# Altium PCB LPCB280R0.PcbDoc (part 2 of 2)
Units mm, origin at the board's own origin, x right, y up, seen from the top; angles counter-clockwise.
Board outline 96 x 109 mm, 2 copper layers (Top Layer, Bottom Layer); 89 components, 73 nets, 288 pads, 730 vias.
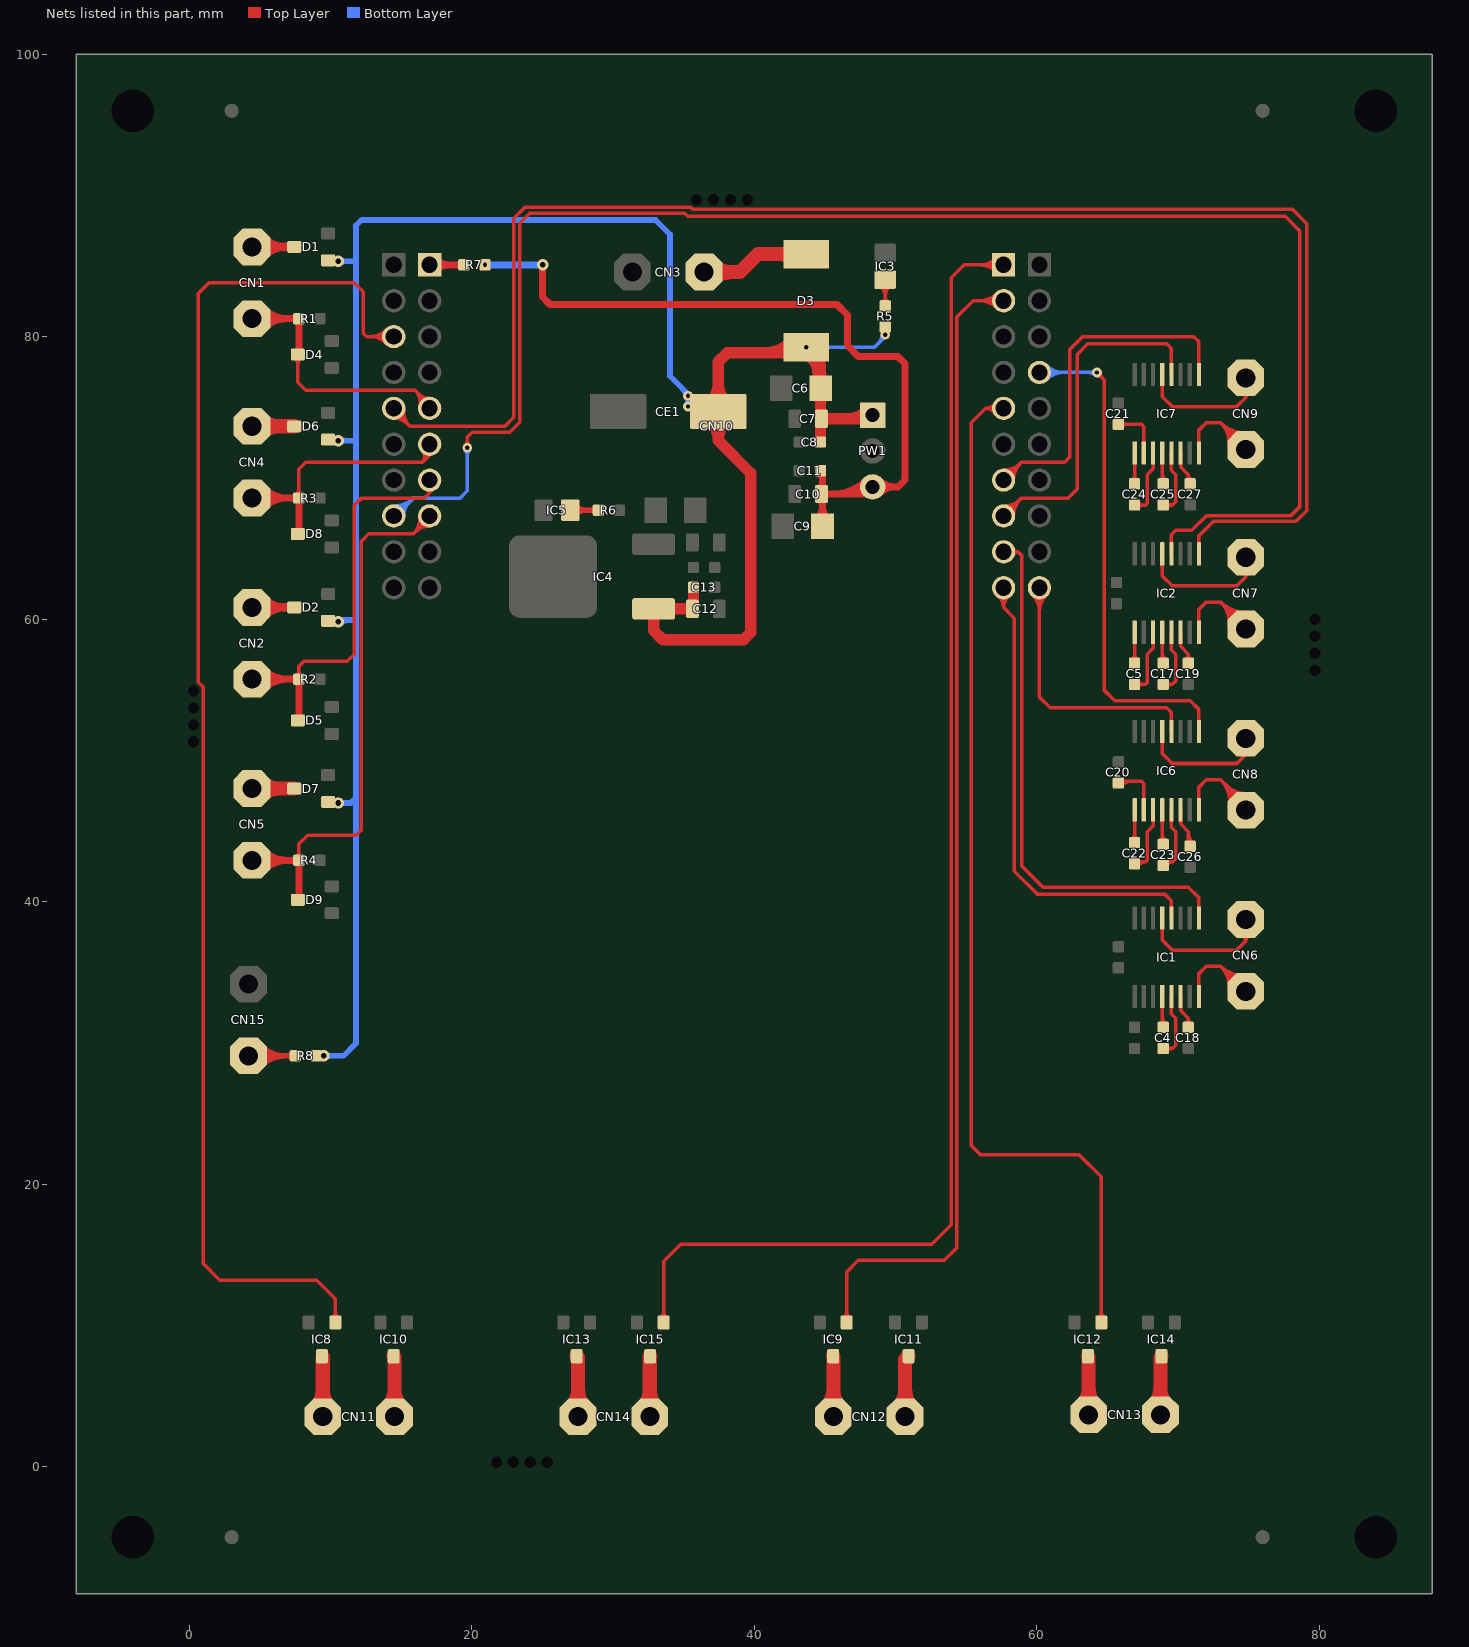
[diagram p2: the nets of this part, all layers, seen from the top]

## Via types
v1: diameter 0.9, hole 0.4, Top Layer to Bottom Layer, tented both sides, 659 vias
v2: diameter 0.7, hole 0.3, Top Layer to Bottom Layer, tented both sides, 36 vias
v3: diameter 0.8, hole 0.4, Top Layer to Bottom Layer, tented both sides, 22 vias
v4: diameter 0.6, hole 0.2, Top Layer to Bottom Layer, tented both sides, 13 vias

## Nets (pads, with @x,y where several pads share a name; then routed paths per layer and width w, separated by ;. In a path a pad name is that pad's centre, name@x,y a point inside that pad or via, vN(x,y) a via of type N, cw(c..) or ccw(c..) an arc to the next point about the centre after c; other vN are vias at no path point) (continued)
NetC4_1: C4.1 IC1.4 | length 3.3
  Top Layer w0.25: C4.1@68.767,31.297 ccw(c68.468,31.596) 68.89,31.596 ; 68.89,31.938 ccw(c69.796,31.938) C4.1@69.155,31.297 ; IC1.4@68.89,33.293 68.89,31.174 C4.1@68.961,31.103
NetC4_2: C4.2 IC1.5 | length 5.6
  Top Layer w0.25: C4.2@68.961,29.603 69.608,29.603 ; C4.2@69.159,29.412 cw(c69.608,28.979) 69.608,29.603 ; C4.2@69.159,29.794 ccw(c69.608,30.227) 69.608,29.603 ; IC1.5@69.54,33.293 69.54,32.06 69.85,31.75 69.85,29.845 69.608,29.603
NetC5_1: C5.1 IC2.1 | length 3.2
  Top Layer w0.25: C5.1@66.735,57.078 ccw(c66.239,57.574) 66.94,57.574 ; C5.1@66.94,56.895 IC2.1@66.94,59.074 ; 66.94,57.521 ccw(c67.566,57.521) C5.1@67.123,57.078
NetC5_2: C5.2 IC2.3 | length 5.7
  Top Layer w0.25: C5.2@66.929,55.384 67.703,55.384 67.818,55.499 67.818,57.531 68.24,57.953 IC2.3@68.24,59.074 ; C5.2@67.123,55.19 cw(c67.593,54.72) 67.593,55.384 cw(c67.593,56.048) C5.2@67.123,55.578
NetC17_1: C17.1 IC2.4 | length 3.3
  Top Layer w0.25: C17.1@68.767,57.078 ccw(c68.468,57.377) 68.89,57.377 ; 68.89,57.719 ccw(c69.796,57.719) C17.1@69.155,57.078 ; IC2.4@68.89,59.074 68.89,56.955 C17.1@68.961,56.884
NetC17_2: C17.2 IC2.5 | length 5.6
  Top Layer w0.25: C17.2@68.961,55.384 69.608,55.384 ; C17.2@69.159,55.193 cw(c69.608,54.76) 69.608,55.384 ; C17.2@69.159,55.575 ccw(c69.608,56.008) 69.608,55.384 ; IC2.5@69.54,59.074 69.54,57.841 69.85,57.531 69.85,55.626 69.608,55.384
NetC18_1: C18.1 IC1.6 | length 3.4
  Top Layer w0.25: IC1.6@70.19,33.293 70.19,32.299 70.739,31.75 ; C18.1@70.548,31.301 ccw(c70.115,31.75) 70.739,31.75 ; C18.1@70.739,31.103 70.739,31.75 ; C18.1@70.93,31.301 cw(c71.363,31.75) 70.739,31.75
NetC19_1: C19.1 IC2.6 | length 3.4
  Top Layer w0.25: IC2.6@70.19,59.074 70.19,58.08 70.739,57.531 ; C19.1@70.548,57.082 ccw(c70.115,57.531) 70.739,57.531 ; C19.1@70.739,56.884 70.739,57.531 ; C19.1@70.93,57.082 cw(c71.363,57.531) 70.739,57.531
NetC20_2: C20.2 IC6.2 | length 4.6
  Top Layer w0.25: C20.2@65.786,48.526 67.425,48.526 67.59,48.361 IC6.2@67.59,46.501 ; C20.2@65.98,48.205 cw(c66.757,47.428) 66.757,48.526
NetC21_2: C21.2 IC7.2 | length 4.8
  Top Layer w0.25: C21.2@65.786,73.799 67.425,73.799 67.59,73.634 IC7.2@67.59,71.774 ; C21.2@65.98,73.605 cw(c66.45,73.135) 66.45,73.799 cw(c66.45,74.463) C21.2@65.98,73.993
NetC22_1: C22.1 IC6.1 | length 3.2
  Top Layer w0.25: C22.1@66.735,44.378 ccw(c66.239,44.874) 66.94,44.874 ; C22.1@66.94,44.322 IC6.1@66.94,46.501 ; 66.94,44.821 ccw(c67.566,44.821) C22.1@67.123,44.378
NetC22_2: C22.2 IC6.3 | length 5.3
  Top Layer w0.25: C22.2@66.929,42.811 67.703,42.811 ; C22.2@67.154,42.526 cw(c67.703,42.14) 67.703,42.811 ; IC6.3@68.24,46.501 68.24,45.38 67.818,44.958 67.818,42.926 67.703,42.811
NetC23_1: C23.1 IC6.4 | length 3.3
  Top Layer w0.25: C23.1@68.767,44.251 ccw(c68.468,44.55) 68.89,44.55 ; 68.89,44.892 ccw(c69.796,44.892) C23.1@69.155,44.251 ; IC6.4@68.89,46.501 68.89,44.382 C23.1@68.961,44.311
NetC23_2: C23.2 IC6.5 | length 5.5
  Top Layer w0.25: C23.2@68.961,42.811 69.608,42.811 ; C23.2@68.986,42.552 cw(c69.302,42.488) C23.2@69.302,42.811 ; C23.2@69.231,42.502 cw(c69.608,42.426) 69.608,42.811 ; IC6.5@69.54,46.501 69.54,45.268 69.85,44.958 69.85,43.053 69.608,42.811
NetC24_1: C24.1 IC7.1 | length 3.2
  Top Layer w0.25: C24.1@66.735,69.778 ccw(c66.239,70.274) 66.94,70.274 ; C24.1@66.94,69.595 IC7.1@66.94,71.774 ; 66.94,70.221 ccw(c67.566,70.221) C24.1@67.123,69.778
NetC24_2: C24.2 IC7.3 | length 5.7
  Top Layer w0.25: C24.2@66.929,68.084 67.703,68.084 67.818,68.199 67.818,70.231 68.24,70.653 IC7.3@68.24,71.774 ; C24.2@67.123,67.89 cw(c67.593,67.42) 67.593,68.084 cw(c67.593,68.748) C24.2@67.123,68.278
NetC25_1: C25.1 IC7.4 | length 3.3
  Top Layer w0.25: C25.1@68.767,69.778 ccw(c68.468,70.077) 68.89,70.077 ; 68.89,70.419 ccw(c69.796,70.419) C25.1@69.155,69.778 ; IC7.4@68.89,71.774 68.89,69.655 C25.1@68.961,69.584
NetC25_2: C25.2 IC7.5 | length 5.6
  Top Layer w0.25: C25.2@68.961,68.084 69.608,68.084 ; C25.2@69.159,67.893 cw(c69.608,67.46) 69.608,68.084 ; C25.2@69.159,68.275 ccw(c69.608,68.708) 69.608,68.084 ; IC7.5@69.54,71.774 69.54,70.541 69.85,70.231 69.85,68.326 69.608,68.084
NetC26_1: C26.1 IC6.6 | length 3.3
  Top Layer w0.25: IC6.6@70.19,46.501 70.19,45.507 70.739,44.958 C26.1@70.739,44.311 ; 70.739,44.901 ccw(c71.837,44.901) C26.1@71.06,44.124
NetC27_1: C27.1 IC7.6 | length 2.9
  Top Layer w0.25: IC7.6@70.19,71.774 70.19,70.78 70.739,70.231 ; C27.1@70.739,69.584 70.739,70.231 ; C27.1@70.988,69.831 cw(c71.186,70.231) 70.739,70.231
NetCN1_1: CN1.1 D1.3 | length 10.3
  Top Layer w0.5: CN1.1@4.445,86.36 D1.3@7.436,86.36 ; CN1.1@4.834,85.971 cw(c5.773,85.032) 5.773,86.36 cw(c5.773,87.688) CN1.1@4.834,86.749 ; CN1.1@5.187,85.618 cw(c6.98,83.825) 6.98,86.36 cw(c6.98,88.895) CN1.1@5.187,87.102 ; 6.697,86.284 cw(c6.894,85.551) D1.3@7.273,86.208 ; 6.697,86.436 ccw(c6.894,87.169) D1.3@7.273,86.512
NetCN1_2: CN1.2 CN10.J3_5 D4.3 R1.2 | length 28.6
  Top Layer w0.25: D4.3@7.478,78.528 cw(c6.966,78.016) 7.69,78.016 cw(c8.414,78.016) D4.3@7.902,78.528 ; D4.3@7.69,78.74 7.69,76.765 8.255,76.2 16.002,76.2 ; 16.257,75.945 ccw(c17.018,76.707) CN10.J3_5@17.018,75.63 ; 16.327,75.875 cw(c15.671,75.219) CN10.J3_5@16.578,75.024 ; CN10.J3_5@16.334,75.077 ccw(c15.136,75.334) 16.002,76.2 ; CN10.J3_5@17.018,74.93 17.018,75.184 16.002,76.2
  Top Layer w0.5: CN1.2@4.445,81.28 R1.2@7.759,81.28 7.759,78.809 D4.3@7.69,78.74 ; CN1.2@4.834,80.891 cw(c5.773,79.952) 5.773,81.28 cw(c5.773,82.608) CN1.2@4.834,81.669 ; CN1.2@5.187,80.538 cw(c6.98,78.745) 6.98,81.28 cw(c6.98,83.815) CN1.2@5.187,82.022 ; 7.759,79.177 ccw(c8.202,79.177) D4.3@7.889,78.864
NetCN2_1: CN2.1 D2.3 | length 10.3
  Top Layer w0.5: CN2.1@4.445,60.833 D2.3@7.436,60.833 ; CN2.1@4.834,60.444 cw(c5.773,59.505) 5.773,60.833 cw(c5.773,62.161) CN2.1@4.834,61.222 ; CN2.1@5.187,60.091 cw(c6.98,58.298) 6.98,60.833 cw(c6.98,63.368) CN2.1@5.187,61.575 ; 6.697,60.757 cw(c6.894,60.024) D2.3@7.273,60.681 ; 6.697,60.909 ccw(c6.894,61.642) D2.3@7.273,60.985
NetCN2_2: CN2.2 CN10.J3_7 D5.3 R2.2 | length 36.6
  Top Layer w0.25: R2.2@7.565,55.947 ccw(c7.095,56.417) 7.759,56.417 ccw(c8.423,56.417) R2.2@7.953,55.947 ; R2.2@7.759,55.753 7.759,56.654 8.128,57.023 11.176,57.023 11.684,57.531 11.684,68.072 12.192,68.58 16.637,68.58 17.018,68.961 ; CN10.J3_7@16.854,69.17 cw(c16.804,68.961) 17.018,68.961 ; CN10.J3_7@17.018,69.85 17.018,68.961 ; CN10.J3_7@17.182,69.17 ccw(c17.232,68.961) 17.018,68.961
  Top Layer w0.5: CN2.2@4.445,55.753 R2.2@7.759,55.753 7.759,52.901 D5.3@7.69,52.832 ; CN2.2@4.834,55.364 cw(c5.773,54.425) 5.773,55.753 cw(c5.773,57.081) CN2.2@4.834,56.142 ; CN2.2@5.187,55.011 cw(c6.98,53.218) 6.98,55.753 cw(c6.98,58.288) CN2.2@5.187,56.495 ; 7.759,53.269 ccw(c8.202,53.269) D5.3@7.889,52.956
NetCN3_1: CN3.1 D3.2 | length 12.8
  Top Layer w1: CN3.1@36.449,84.582 38.989,84.582 40.257,85.85 D3.2@43.688,85.85 ; CN3.1@37.015,84.016 cw(c38.38,82.651) 38.38,84.582 cw(c38.38,86.513) CN3.1@37.015,85.148 ; D3.2@42.739,85.485 ccw(c41.858,84.604) 41.858,85.85 ccw(c41.858,87.096) D3.2@42.739,86.215
NetCN4_1: CN4.1 D6.3 | length 6
  Top Layer w1: CN4.1@4.445,73.66 D6.3@7.436,73.66 ; CN4.1@5.011,73.094 cw(c6.376,71.729) 6.376,73.66 cw(c6.376,75.591) CN4.1@5.011,74.226
NetCN4_2: CN4.2 CN10.J3_6 D8.3 R3.2 | length 28.4
  Top Layer w0.25: R3.2@7.565,68.774 ccw(c7.095,69.244) 7.759,69.244 ccw(c8.423,69.244) R3.2@7.953,68.774 ; R3.2@7.759,68.58 7.759,70.624 8.255,71.12 16.51,71.12 ; CN10.J3_6@16.516,71.902 cw(c16.116,71.514) 16.51,71.12 ; 16.689,71.299 ccw(c16.298,71.691) CN10.J3_6@16.695,72.077 ; 16.869,71.479 ccw(c16.48,71.868) CN10.J3_6@16.875,72.251 ; CN10.J3_6@17.018,72.39 17.018,71.628 16.51,71.12
  Top Layer w0.5: CN4.2@4.445,68.58 R3.2@7.759,68.58 7.759,66.109 D8.3@7.69,66.04 ; CN4.2@4.834,68.191 cw(c5.773,67.252) 5.773,68.58 cw(c5.773,69.908) CN4.2@4.834,68.969 ; CN4.2@5.187,67.838 cw(c6.98,66.045) 6.98,68.58 cw(c6.98,71.115) CN4.2@5.187,69.322 ; 7.759,66.477 ccw(c8.202,66.477) D8.3@7.889,66.164
NetCN5_1: CN5.1 D7.3 | length 6
  Top Layer w1: CN5.1@4.445,48.006 D7.3@7.436,48.006 ; CN5.1@5.011,47.44 cw(c6.376,46.075) 6.376,48.006 cw(c6.376,49.937) CN5.1@5.011,48.572
NetCN5_2: CN5.2 CN10.J3_8 D9.3 R4.2 | length 49.7
  Top Layer w0.25: R4.2@7.565,43.12 ccw(c7.095,43.59) 7.759,43.59 ccw(c8.423,43.59) R4.2@7.953,43.12 ; R4.2@7.759,42.926 7.759,44.081 8.382,44.704 11.811,44.704 12.192,45.085 12.192,65.532 12.7,66.04 15.875,66.04 ; 16.04,66.205 cw(c17.018,65.227) CN10.J3_8@17.018,66.61 ; 16.257,66.422 ccw(c15.494,67.185) CN10.J3_8@16.569,67.273 ; CN10.J3_8@16.32,67.253 cw(c14.788,67.127) 15.875,66.04 ; 16.467,66.632 cw(c17.018,66.08) CN10.J3_8@17.018,66.86 ; CN10.J3_8@17.018,67.31 17.018,67.183 15.875,66.04
  Top Layer w0.5: CN5.2@4.445,42.926 R4.2@7.759,42.926 7.759,40.201 D9.3@7.69,40.132 ; CN5.2@4.834,42.537 cw(c5.773,41.598) 5.773,42.926 cw(c5.773,44.254) CN5.2@4.834,43.315 ; CN5.2@5.187,42.184 cw(c6.98,40.391) 6.98,42.926 cw(c6.98,45.461) CN5.2@5.187,43.668 ; 7.759,40.569 ccw(c8.202,40.569) D9.3@7.889,40.256
NetCN6_1: CN6.1 IC1.8 | length 14.6
  Top Layer w0.25: IC1.8@71.49,33.293 71.49,34.914 72.009,35.433 73.025,35.433 CN6.1@74.803,33.655 ; CN6.1@73.633,33.759 ccw(c71.538,33.946) 73.025,35.433 ccw(c74.512,36.92) CN6.1@74.699,34.825 ; CN6.1@73.882,33.737 ccw(c72.233,33.884) 73.403,35.055 ccw(c74.574,36.225) CN6.1@74.721,34.576 ; CN6.1@74.131,33.715 ccw(c72.927,33.822) 73.782,34.676 ccw(c74.636,35.531) CN6.1@74.743,34.327
NetCN6_2: CN6.2 IC1.13 | length 10.6
  Top Layer w0.25: IC1.13@68.89,38.843 68.89,37.282 69.596,36.576 74.168,36.576 74.803,37.211 ; CN6.2@74.504,37.599 cw(c74.402,37.211) 74.803,37.211 ; CN6.2@74.803,38.735 74.803,37.211 ; CN6.2@75.102,37.599 ccw(c75.204,37.211) 74.803,37.211
NetCN7_1: CN7.1 IC2.8 | length 15.1
  Top Layer w0.25: IC2.8@71.49,59.074 71.49,60.695 72.009,61.214 73.025,61.214 CN7.1@74.803,59.436 ; 73.389,60.85 cw(c72.163,59.624) CN7.1@73.885,59.419 ; 73.449,60.79 ccw(c74.791,62.131) CN7.1@74.799,60.234 ; CN7.1@73.636,59.448 ccw(c71.513,59.702) 73.025,61.214 ccw(c74.787,62.976) CN7.1@74.798,60.484 ; 73.753,60.486 cw(c72.814,59.547) CN7.1@74.133,59.389 ; 73.874,60.365 ccw(c74.795,61.287) CN7.1@74.8,59.984
NetCN7_2: CN7.2 IC2.13 | length 10.2
  Top Layer w0.25: IC2.13@68.89,64.624 68.89,63.063 69.596,62.357 74.168,62.357 74.803,62.992 ; CN7.2@74.602,63.231 cw(c74.56,62.992) 74.803,62.992 ; CN7.2@74.803,64.516 74.803,62.992 ; CN7.2@75.004,63.231 ccw(c75.046,62.992) 74.803,62.992
NetCN8_1: CN8.1 IC6.8 | length 15
  Top Layer w0.25: IC6.8@71.49,46.501 71.49,48.122 72.009,48.641 73.025,48.641 CN8.1@74.803,46.863 ; 73.025,48.641 cw(c71.448,47.064) CN8.1@73.645,46.683 ; 73.366,48.3 cw(c72.029,46.963) CN8.1@73.892,46.64 ; 73.448,48.218 ccw(c74.803,49.574) CN8.1@74.803,47.657 ; 73.706,47.96 cw(c72.61,46.863) CN8.1@74.138,46.597 ; 73.874,47.792 ccw(c74.803,48.72) CN8.1@74.803,47.407 ; CN8.1@74.047,47.619 cw(c73.19,46.762) CN8.1@74.384,46.555
NetCN8_2: CN8.2 IC6.13 | length 9.6
  Top Layer w0.25: IC6.13@68.89,52.051 68.89,50.49 69.596,49.784 74.168,49.784 74.803,50.419 CN8.2@74.803,51.943
NetCN9_1: CN9.1 IC7.8 | length 15.1
  Top Layer w0.25: IC7.8@71.49,71.774 71.49,73.395 72.009,73.914 73.025,73.914 CN9.1@74.803,72.136 ; 73.389,73.55 cw(c72.163,72.324) CN9.1@73.885,72.119 ; 73.449,73.49 ccw(c74.791,74.831) CN9.1@74.799,72.934 ; CN9.1@73.636,72.148 ccw(c71.513,72.402) 73.025,73.914 ccw(c74.787,75.676) CN9.1@74.798,73.184 ; 73.753,73.186 cw(c72.814,72.247) CN9.1@74.133,72.089 ; 73.874,73.065 ccw(c74.795,73.987) CN9.1@74.8,72.684
NetCN9_2: CN9.2 IC7.13 | length 10.2
  Top Layer w0.25: IC7.13@68.89,77.324 68.89,75.763 69.596,75.057 74.168,75.057 74.803,75.692 ; CN9.2@74.602,75.931 cw(c74.56,75.692) 74.803,75.692 ; CN9.2@74.803,77.216 74.803,75.692 ; CN9.2@75.004,75.931 ccw(c75.046,75.692) 74.803,75.692
NetCN10_J3_1: CN10.J3_1 R7.1 | length 4.6
  Top Layer w0.5: CN10.J3_1@17.018,85.09 R7.1@19.443,85.09 ; CN10.J3_1@17.425,84.683 cw(c18.406,83.702) 18.406,85.09 cw(c18.406,86.478) CN10.J3_1@17.425,85.497
NetCN11_1: CN11.1 IC8.3 | length 7.3
  Top Layer w1: CN11.1@8.885,4.103 ccw(c7.52,5.468) 9.451,5.468 ccw(c11.382,5.468) CN11.1@10.017,4.103 ; CN11.1@9.451,3.537 IC8.3@9.451,7.764
NetCN11_2: CN11.2 IC10.3 | length 7.3
  Top Layer w1: CN11.2@13.965,4.103 ccw(c12.6,5.468) 14.531,5.468 ccw(c16.462,5.468) CN11.2@15.097,4.103 ; IC10.3@14.478,7.817 14.531,7.764 CN11.2@14.531,3.537
NetCN12_1: CN12.1 IC9.3 | length 7.3
  Top Layer w1: CN12.1@45.038,4.103 ccw(c43.672,5.468) 45.604,5.468 ccw(c47.535,5.468) CN12.1@46.169,4.103 ; IC9.3@45.593,7.817 45.604,7.806 CN12.1@45.604,3.537
NetCN12_2: CN12.2 IC11.3 | length 7.9
  Top Layer w1: CN12.2@50.118,4.103 ccw(c48.752,5.468) 50.684,5.468 ccw(c52.615,5.468) CN12.2@51.249,4.103 ; CN12.2@50.684,3.537 50.684,7.574 IC11.3@50.927,7.817 ; IC11.3@50.684,7.336 cw(c51.333,7.336) IC11.3@50.874,7.795
NetCN13_1: CN13.1 IC12.3 | length 7.2
  Top Layer w1: CN13.1@63.114,4.23 ccw(c61.749,5.595) 63.68,5.595 ccw(c65.611,5.595) CN13.1@64.246,4.23 ; IC12.3@63.627,7.817 63.68,7.764 CN13.1@63.68,3.664
NetCN13_2: CN13.2 IC14.3 | length 7.2
  Top Layer w1: CN13.2@68.194,4.23 ccw(c66.829,5.595) 68.76,5.595 ccw(c70.691,5.595) CN13.2@69.326,4.23 ; CN13.2@68.76,3.664 68.76,7.743 IC14.3@68.834,7.817
NetCN14_1: CN14.1 IC13.3 | length 7.4
  Top Layer w1: CN14.1@26.962,4.103 ccw(c25.596,5.468) 27.527,5.468 ccw(c29.459,5.468) CN14.1@28.093,4.103 ; IC13.3@27.432,7.817 27.527,7.722 CN14.1@27.527,3.537
NetCN14_2: CN14.2 IC15.3 | length 7.3
  Top Layer w1: CN14.2@32.042,4.103 ccw(c30.676,5.468) 32.607,5.468 ccw(c34.539,5.468) CN14.2@33.173,4.103 ; CN14.2@32.607,3.537 32.607,7.785 IC15.3@32.639,7.817
NetCN15_2: CN15.2 R8.1 | length 10.9
  Top Layer w0.4: CN15.2@4.191,29.083 R8.1@7.505,29.083 ; CN15.2@4.686,28.588 cw(c5.881,27.393) 5.881,29.083 cw(c5.881,30.773) CN15.2@4.686,29.578 ; CN15.2@4.969,28.305 cw(c6.847,26.427) 6.847,29.083 cw(c6.847,31.739) CN15.2@4.969,29.861 ; R8.1@7.364,28.942 ccw(c7.022,28.6) 7.022,29.083 ccw(c7.022,29.566) R8.1@7.364,29.224
NetIC3_A: IC3.A R5.1 | length 5.9
  Top Layer w0.25: IC3.A@48.905,83.67 cw(c48.009,82.774) 49.276,82.774 cw(c50.543,82.774) IC3.A@49.647,83.67 ; R5.1@49.082,82.379 ccw(c48.612,82.849) 49.276,82.849 ccw(c49.94,82.849) R5.1@49.47,82.379 ; IC3.A@49.082,83.847 cw(c48.612,83.377) 49.276,83.377 cw(c49.94,83.377) IC3.A@49.47,83.847 ; R5.1@49.276,82.185 IC3.A@49.276,84.041
NetIC5_A: IC5.A R6.1 | length 4.4
  Top Layer w0.4: IC5.A@26.985,67.719 R6.1@28.968,67.719 ; IC5.A@27.303,67.401 cw(c28.071,66.633) 28.071,67.719 cw(c28.071,68.805) IC5.A@27.303,68.037 ; R6.1@28.827,67.578 ccw(c28.485,67.236) 28.485,67.719 ccw(c28.485,68.202) R6.1@28.827,67.86
P5V: C9.1 C10.1 C11.1 PW1.3 R7.2 | length 65.1
  Top Layer w0.5: v3(25.019,85.09) 25.019,82.804 25.527,82.296 45.847,82.296 46.609,81.534 46.609,79.375 47.371,78.613 50.165,78.613 50.673,78.105 50.673,69.85 50.193,69.37 PW1.3@48.387,69.37 47.879,68.862 C10.1@44.834,68.862 ; C9.1@44.445,67.065 ccw(c43.506,68.004) 44.834,68.004 ccw(c46.162,68.004) C9.1@45.223,67.065 ; C11.1@44.586,70.407 cw(c43.987,69.808) 44.834,69.808 ; C10.1@44.624,68.521 cw(c44.116,68.013) 44.834,68.013 ; C10.1@44.624,69.203 ccw(c44.116,69.711) 44.834,69.711 ; C11.1@44.692,70.513 44.834,70.371 C10.1@44.834,68.862 ; C10.1@44.765,68.862 C10.1@44.834,68.862 ; C9.1@44.834,66.576 C10.1@44.834,68.862 ; C10.1@44.906,68.721 cw(c45.248,68.379) 45.248,68.862 cw(c45.248,69.345) C10.1@44.906,69.003 ; 45.591,68.862 ccw(c45.591,72.166) PW1.3@47.927,69.83 ; 46.798,68.862 ccw(c46.798,70.959) PW1.3@48.281,69.476 ; PW1.3@48.847,68.91 cw(c49.956,67.801) 49.956,69.37 cw(c49.956,70.939) PW1.3@48.847,69.83
  Bottom Layer w0.5: v2(20.943,85.09) v3(25.019,85.09)
P24V: C6.1 C7.1 C8.1 C12.1 C13.1 CE1.1 D1.1 D2.1 D3.1 D6.1 D7.1 IC4.1 PW1.1 R5.2 R8.2 | length 187.6
  Top Layer w0.8: IC4.1@32.624,60.478 cw(c32.006,59.86) 32.88,59.86 cw(c33.754,59.86) IC4.1@33.136,60.478 ; IC4.1@33.898,60.478 cw(c34.516,59.86) 34.516,60.734 cw(c34.516,61.608) IC4.1@33.898,60.99 ; C13.1@35.699,62.258 35.699,60.807 C12.1@35.626,60.734 IC4.1@32.88,60.734 32.88,59.195 33.528,58.547 39.243,58.547 39.751,59.055 39.751,70.358 37.459,72.65 CE1.1@37.459,74.704 37.459,78.226 38.1,78.867 D3.1@43.688,78.867 ; CE1.1@36.858,74.103 cw(c35.407,72.652) 37.459,72.652 cw(c39.511,72.652) CE1.1@38.06,74.103 ; CE1.1@36.858,75.305 ccw(c35.407,76.756) 37.459,76.756 ccw(c39.511,76.756) CE1.1@38.06,75.305 ; 40.692,78.867 ccw(c40.692,81.662) D3.1@42.668,79.686 ; D3.1@42.884,78.867 ccw(c42.884,80.054) D3.1@43.723,79.215 ; D3.1@43.638,79.25 ccw(c44.442,79.25) D3.1@43.873,78.682 ; v2(43.688,79.25) D3.1@43.688,78.867 ; D3.1@43.836,78.814 cw(c41.771,76.749) C6.1@44.692,76.749 ; D3.1@44.073,78.667 cw(c43.776,77.801) 44.692,77.801 ; C6.1@44.361,76.655 ccw(c43.342,77.243) 44.478,77.547 ; C6.1@44.424,75.972 cw(c43.778,75.326) 44.692,75.326 ; C6.1@44.424,76.738 ccw(c43.778,77.384) 44.692,77.384 ; 44.555,77.26 ccw(c45.285,77.456) C6.1@44.907,76.801 ; C8.1@44.692,72.545 44.692,77.863 D3.1@43.688,78.867 ; 44.692,75.253 cw(c45.709,75.253) C6.1@44.99,75.972 ; 44.692,77.457 ccw(c45.709,77.457) C6.1@44.99,76.738 ; C7.1@44.765,74.196 48.133,74.196 PW1.1@48.387,74.45 ; 46.567,74.196 ccw(c46.567,76.27) PW1.1@48.033,74.804
  Bottom Layer w0.25: v2(43.688,79.25) 48.516,79.25 49.276,80.01 v2(49.276,80.137) ; v2@43.847,79.091 cw(c44.231,78.707) 44.231,79.25 cw(c44.231,79.793) v2@43.847,79.409 ; 48.802,79.536 ccw(c48.201,80.137) v2@49.051,80.137
  Bottom Layer w0.4: v3(9.525,29.083) 10.922,29.083 11.811,29.972 11.811,47.371 ; v3@9.666,28.942 cw(c10.008,28.6) 10.008,29.083 cw(c10.008,29.566) v3@9.666,29.224 ; v3(10.541,46.99) 11.43,46.99 11.811,47.371 ; v3(10.541,59.817) 10.668,59.944 11.811,59.944 ; v3(10.541,72.644) 11.811,72.644 ; v3(10.541,85.344) 11.811,85.344 ; v3@10.682,46.849 cw(c11.024,46.507) 11.024,46.99 cw(c11.024,47.473) v3@10.682,47.131 ; v3@10.682,59.676 cw(c11.33,59.028) 11.33,59.944 ; v3@10.682,72.503 cw(c11.024,72.161) 11.024,72.644 cw(c11.024,73.127) v3@10.682,72.785 ; v3@10.682,85.203 cw(c11.024,84.861) 11.024,85.344 cw(c11.024,85.827) v3@10.682,85.485 ; 34.96,76.292 cw(c34.487,75.819) v2@35.156,75.819 ; v2@35.2,75.163 ccw(c34.944,75.419) 35.306,75.419 ccw(c35.668,75.419) v2@35.412,75.163 ; v2@35.2,75.713 cw(c34.944,75.457) 35.306,75.457 cw(c35.668,75.457) v2@35.412,75.713 ; v2(35.306,75.057) 35.306,75.946 34.036,77.216 34.036,87.249 33.02,88.265 12.192,88.265 11.811,87.884 11.811,85.344 ; 11.811,47.371 11.811,59.944 ; 11.811,59.944 11.811,72.644 ; 11.811,72.644 11.811,85.344
  other v2: 35.306,75.819
STEP_1: CN10.J1_3 IC8.1 | length 103.8
  Top Layer w0.25: IC8.1@10.136,10.504 ccw(c9.624,11.016) 10.348,11.016 ccw(c11.072,11.016) IC8.1@10.56,10.504 ; IC8.1@10.348,10.217 10.348,11.877 9.017,13.208 2.159,13.208 0.985,14.382 0.985,32.162 0.985,55.198 0.635,55.548 0.635,83.058 1.397,83.82 11.684,83.82 12.319,83.185 12.319,80.264 12.573,80.01 CN10.J1_3@14.478,80.01 ; CN10.J1_3@13.983,79.515 ccw(c12.788,78.32) 12.788,80.01 ccw(c12.788,81.7) CN10.J1_3@13.983,80.505 ; CN10.J1_3@14.16,79.692 ccw(c13.392,78.924) 13.392,80.01 ccw(c13.392,81.096) CN10.J1_3@14.16,80.328
STEP_2: CN10.J4_5 IC12.1 | length 77.1
  Top Layer w0.25: CN10.J4_5@57.066,74.556 ccw(c56.388,74.128) 56.388,74.93 ; CN10.J4_5@57.066,75.304 cw(c56.388,75.732) 56.388,74.93 ; CN10.J4_5@57.658,74.93 56.388,74.93 ; IC12.1@64.365,10.504 ccw(c63.853,11.016) 64.577,11.016 ccw(c65.301,11.016) IC12.1@64.789,10.504 ; IC12.1@64.577,10.217 64.577,20.513 62.992,22.098 56.007,22.098 55.372,22.733 55.372,73.914 56.388,74.93
STEP_3: CN10.J4_2 IC9.1 | length 87.3
  Top Layer w0.25: IC9.1@46.331,10.504 ccw(c45.819,11.016) 46.543,11.016 ccw(c47.267,11.016) IC9.1@46.755,10.504 ; IC9.1@46.543,10.217 46.543,13.777 47.371,14.605 53.467,14.605 54.356,15.494 54.356,81.407 55.499,82.55 CN10.J4_2@57.658,82.55 ; CN10.J4_2@57.163,82.055 ccw(c55.968,80.86) 55.968,82.55 ccw(c55.968,84.24) CN10.J4_2@57.163,83.045 ; CN10.J4_2@57.34,82.232 ccw(c56.572,81.464) 56.572,82.55 ccw(c56.572,83.636) CN10.J4_2@57.34,82.868
STEP_4: CN10.J4_1 IC15.1 | length 102.4
  Top Layer w0.25: IC15.1@33.377,10.504 ccw(c32.865,11.016) 33.589,11.016 ccw(c34.313,11.016) IC15.1@33.801,10.504 ; IC15.1@33.589,10.217 33.589,14.539 34.798,15.748 52.578,15.748 53.946,17.116 53.946,84.172 54.864,85.09 CN10.J4_1@57.658,85.09 ; CN10.J4_1@57.163,84.595 ccw(c55.968,83.4) 55.968,85.09 ccw(c55.968,86.78) CN10.J4_1@57.163,85.585 ; CN10.J4_1@57.34,84.772 ccw(c56.572,84.004) 56.572,85.09 ccw(c56.572,86.176) CN10.J4_1@57.34,85.408
SW_EXT_1: CN10.J4_10 IC1.12 | length 36.8
  Top Layer w0.25: CN10.J4_10@57.239,61.669 cw(c56.614,60.833) 57.658,60.833 ; CN10.J4_10@57.389,61.87 cw(c56.987,61.332) 57.658,61.332 cw(c58.329,61.332) CN10.J4_10@57.927,61.87 ; CN10.J4_10@57.658,62.23 57.658,60.833 ; CN10.J4_10@58.077,61.669 ccw(c58.702,60.833) 57.658,60.833 ; IC1.12@69.54,38.843 69.54,40.061 69.088,40.513 60.071,40.513 58.42,42.164 58.42,60.071 57.658,60.833
SW_EXT_2: CN10.J2_10 IC6.12 | length 23.2
  Top Layer w0.25: CN10.J2_10@59.703,61.735 cw(c58.508,60.54) 60.198,60.54 cw(c61.888,60.54) CN10.J2_10@60.693,61.735 ; CN10.J2_10@59.88,61.912 cw(c59.112,61.144) 60.198,61.144 cw(c61.284,61.144) CN10.J2_10@60.516,61.912 ; CN10.J2_10@60.198,62.23 60.198,54.483 60.96,53.721 69.215,53.721 69.54,53.396 IC6.12@69.54,52.051
SW_EXT_3: CN10.J1_8 IC2.12 | length 120.8
  Top Layer w0.25: v2@19.526,72.295 ccw(c19.142,72.679) 19.685,72.679 ccw(c20.228,72.679) v2@19.844,72.295 ; v2(19.685,72.136) 19.685,72.898 20.037,73.25 22.704,73.25 23.397,73.943 23.397,88.04 24.101,88.744 35.081,88.744 35.306,88.519 77.597,88.519 78.613,87.503 78.613,67.945 78.007,67.339 72.038,67.339 70.993,66.294 69.85,66.294 69.54,65.984 IC2.12@69.54,64.624
  Bottom Layer w0.25: CN10.J1_8@14.478,67.31 14.605,67.31 15.875,68.58 ; CN10.J1_8@14.482,67.76 ccw(c14.492,69.119) 15.453,68.158 ; CN10.J1_8@14.483,68.01 ccw(c14.499,69.956) 15.875,68.58 ; CN10.J1_8@14.928,67.31 cw(c15.708,67.31) 15.156,67.861 ; CN10.J1_8@15.178,67.31 cw(c16.561,67.31) 15.583,68.288 ; v2@19.526,71.977 cw(c19.142,71.593) 19.685,71.593 cw(c20.228,71.593) v2@19.844,71.977 ; v2(19.685,72.136) 19.685,69.088 19.177,68.58 15.875,68.58
SW_EXT_4: CN10.J4_8 IC7.12 | length 28.9
  Top Layer w0.25: CN10.J4_8@57.658,67.31 58.928,68.58 62.23,68.58 62.865,69.215 62.865,78.74 63.627,79.502 69.215,79.502 69.54,79.177 IC7.12@69.54,77.324 ; CN10.J4_8@57.658,67.76 ccw(c57.658,68.846) 58.426,68.078 ccw(c59.194,67.31) CN10.J4_8@58.108,67.31 ; CN10.J4_8@57.658,68.01 ccw(c57.658,69.7) 58.853,68.505 ccw(c60.048,67.31) CN10.J4_8@58.358,67.31
SW_RET_1: CN10.J4_9 IC1.9 | length 39.2
  Top Layer w0.25: CN10.J4_9@57.658,64.77 58.674,64.77 ; CN10.J4_9@58.312,64.521 cw(c58.674,64.383) 58.674,64.77 ; CN10.J4_9@58.312,65.019 ccw(c58.674,65.157) 58.674,64.77 ; IC1.9@71.49,38.843 71.49,40.27 70.739,41.021 60.452,41.021 58.928,42.545 58.928,64.516 58.674,64.77
SW_RET_2: CN10.J2_4 IC6.9 | length 41.7
  Top Layer w0.25: v2@64.262,77.245 cw(c64.262,76.702) 64.646,77.086 cw(c65.03,77.47) v2@64.487,77.47 ; v2(64.262,77.47) 64.77,76.962 64.77,54.991 65.532,54.229 70.866,54.229 71.49,53.605 IC6.9@71.49,52.051
  Bottom Layer w0.25: CN10.J2_4@60.198,77.47 v2(64.262,77.47) ; CN10.J2_4@60.516,77.152 cw(c61.284,76.384) 61.284,77.47 cw(c61.284,78.556) CN10.J2_4@60.516,77.788 ; CN10.J2_4@60.693,76.975 cw(c61.888,75.78) 61.888,77.47 cw(c61.888,79.16) CN10.J2_4@60.693,77.965 ; v2@64.103,77.311 ccw(c63.719,76.927) 63.719,77.47 ccw(c63.719,78.013) v2@64.103,77.629
SW_RET_3: CN10.J1_5 IC2.9 | length 114.3
  Top Layer w0.25: CN10.J1_5@14.478,74.23 cw(c14.478,72.847) 15.456,73.825 ; CN10.J1_5@14.478,74.48 cw(c14.478,73.7) 15.029,74.252 ; CN10.J1_5@14.478,74.93 14.478,74.803 15.621,73.66 ; CN10.J1_5@14.927,74.893 ccw(c16.002,74.805) 15.239,74.042 ; CN10.J1_5@15.176,74.873 ccw(c16.708,74.747) 15.621,73.66 ; IC2.9@71.49,64.624 71.49,65.902 72.517,66.929 78.359,66.929 79.121,67.691 79.121,88.011 78.117,89.015 35.635,89.015 35.496,89.154 23.749,89.154 22.987,88.392 22.987,74.295 22.352,73.66 15.621,73.66
SW_RET_4: CN10.J4_7 IC7.9 | length 29.3
  Top Layer w0.25: CN10.J4_7@57.658,69.85 58.928,71.12 61.976,71.12 62.357,71.501 62.357,79.121 63.246,80.01 71.12,80.01 71.49,79.64 IC7.9@71.49,77.324 ; CN10.J4_7@57.658,70.3 ccw(c57.658,71.386) 58.426,70.618 ccw(c59.194,69.85) CN10.J4_7@58.108,69.85 ; CN10.J4_7@57.658,70.55 ccw(c57.658,72.24) 58.853,71.045 ccw(c60.048,69.85) CN10.J4_7@58.358,69.85
pads on no net: CN10.J1_1 CN10.J1_2 CN10.J1_6 CN10.J1_7 CN10.J1_10 CN10.J2_2 CN10.J2_3 CN10.J2_5 CN10.J2_6 CN10.J2_7 CN10.J2_8 CN10.J2_9 CN10.J3_3 CN10.J3_4 CN10.J3_9 CN10.J3_10 CN10.J4_4 D1.2 D2.2 D4.2 D5.2 D6.2 D7.2 D8.2 D9.2 FID8_1.0 FID8_1_1.0 FID10_1.0 FID10_1_1.0 IC1.7 IC1.14 IC2.7 IC2.14 IC6.7 IC6.14 IC7.7 IC7.14 SN1.0 SN2.0 SN3.0 SN4.0 TOOLHOLE1_1.TOOL TOOLHOLE1_1_1.TOOL TOOLHOLE5_1.TOOL1 TOOLHOLE5_1_1.TOOL1

## Polygon pours and split planes (outlines as drawn)
DGND on Bottom Layer "Bottom Layer-No Net" (solid, remove dead copper, pour order 7): 0,90 80,90 80,0 0,0
DGND on Top Layer "Bottom Layer-No Net" (solid, remove dead copper, pour order 8): 0,90 80,90 80,0 0,0

## Keep-outs
Keep-Out Layer:
  lines w0.5: 0,0 0,90 80,90 80,0 0,0

## Silkscreen, mask and mechanical layers (free items; w line width, h text height)
Top Overlay:
  text "5V" at 52.959,83.848 h2 r90
  text "3V" at 24.003,69.37 h2
  text "LPCB280R0" at 78.359,1.651 h3 r90
  text "SOL1" at 14.986,-29.21 h2 r90
Top Paste:
  lines w1: -22.647,-15.577 -22.647,197.423 177.353,197.423 177.353,-15.577 -22.647,-15.577
Mechanical 1:
  lines w0.1: -8,-9 88,-9 88,100 -8,100 -8,-9
  lines w0.127: 0,0 80,0 80,90 0,90 0,0
Mechanical 3:
  lines w2.4: -1.2,50.009 -1.2,-1.2 20.644,-1.2 ; -1.2,56.105 -1.2,91.2 34.741,91.2 ; 26.105,-1.2 81.2,-1.2 81.2,55.597 ; 40.837,91.2 81.2,91.2 81.2,61.693
Mechanical 4:
  lines w0.203: 74.158,-44.783 112.099,-44.783 ; 112.059,-55.215 74.167,-55.223 74.167,-23.219 112.059,-23.215 ; 112.099,-55.222 112.099,-23.222
  lines w0.305: 112.751,-52.533 188.696,-52.536 ; 112.751,-48.533 188.696,-48.523 ; 112.751,-44.777 188.696,-44.793 ; 112.756,-44.77 188.701,-44.786 ; 112.756,-41.045 188.701,-41.048 ; 112.756,-37.045 188.701,-37.035 ; 112.756,-33.045 188.701,-33.047 ; 113.059,-29.215 188.559,-29.215 264.559,-29.215 ; 113.059,-28.715 188.559,-28.715 ; 125.349,-55.972 125.349,-23.222 ; 138.099,-55.972 138.099,-23.222 ; 150.849,-55.972 150.849,-23.222 ; 162.849,-55.972 162.849,-23.222 ; 177.215,-56.01 177.215,-23.244 ; 188.701,-48.544 264.698,-48.544 ; 188.726,-41.051 264.749,-41.051 ; 199.904,-56.037 199.904,-48.544 ; 218.724,-56.037 218.724,-48.544 ; 242.617,-56.09 242.617,-48.507 ; 242.701,-48.544 242.701,-41.051
  lines w0.508: -120.29,-16.032 -115.286,-16.032 ; -120.29,28.951 -115.286,28.951 ; -120.29,73.935 -115.286,73.935 ; -120.29,118.943 -115.286,118.943 ; -120.29,163.927 -115.286,163.927 ; -55.291,-61.041 -55.291,-56.037 ; -55.291,203.957 -55.291,208.961 ; -2.993,203.957 -2.993,208.961 ; 9.707,-61.041 9.707,-56.037 ; 55.343,203.969 55.343,208.973 ; 74.706,-61.041 74.706,-56.037 ; 112.809,-55.965 112.809,-23.215 264.559,-23.215 ; 139.704,-61.041 139.704,-56.037 ; 139.704,203.957 139.704,208.961 ; 188.697,-23.259 188.701,-56.037 ; 204.703,-61.041 204.703,-56.037 ; 204.703,203.957 204.703,208.961 ; 264.698,-16.032 269.702,-16.032 ; 264.698,28.951 269.702,28.951 ; 264.723,73.935 269.702,73.935 ; 264.723,118.943 269.702,118.943 ; 264.723,163.927 269.702,163.927 ; -120.29,-61.041 -120.29,208.961 269.702,208.961 269.702,-61.041 -120.29,-61.041 ; -115.286,-56.037 -115.286,203.957 264.723,203.957 264.723,-56.037 -115.286,-56.037
  text "1" at -85.289,204.948 h3
  text "2" at -37.994,204.948 h3
  text "3" at 39.705,204.948 h3
  text "4" at 103.713,204.948 h3
  text "5" at 172.724,204.948 h3
  text "6" at 233.71,204.948 h3
  text "A" at -118.283,182.951 h3
  text "A" at 265.714,182.951 h3
  text "B" at 265.714,139.924 h3
  text "B" at -118.283,138.933 h3
  text "C" at -118.283,93.95 h3
  text "C" at 265.714,93.95 h3
  text "D" at -118.283,48.966 h3
  text "D" at 265.714,48.966 h3
  text ".PCB_FILE_NAME_NO_PATH" at 272.543,32.303 h1.52 r90
  text "FILENAME:" at 272.416,21.635 h1.52 r90
  text "E" at -118.283,3.958 h3
  text "E" at 265.714,3.958 h3
  text "SIL3_PCBTEMPLATE_A3.PCB" at 272.67,-10.75 h1.52 r90
  text "TEMPLATE:" at 272.521,-22.72 h1.52 r90
  text "ISSUE" at 115.559,-26.715 h2.01
  text "DATE" at 128.059,-26.715 h2.01
  text "ECN" at 141.559,-26.715 h2.01
  text "DRAWN" at 152.559,-26.715 h2.01
  text "APP" at 179.559,-26.715 h2.01
  text "SIL3 Pty Ltd" at 75.693,-26.752 h2.54
  text "CHECKED" at 164.134,-26.8 h2.01
  text ".SIL3_PROJECT" at 205.106,-27.26 h1.78
  text "PROJECT:" at 190.305,-27.389 h2.01
  text "Factory 10" at 75.541,-30.308 h1.52
  text "R1.0" at 115.16,-32.124 h2.01
  text "PCB DESCRIPTION:" at 190.559,-32.215 h2.01
  text "01.08.12" at 126.259,-32.342 h2.01
  text "LJG" at 153.768,-32.378 h2.01
  text "9-13 Dingley Avenue" at 75.541,-33.229 h1.52
  text "Dandenong, VICTORIA, 3175" at 75.541,-35.769 h1.52
  text ".SIL3_PCB_DESC" at 190.501,-37.166 h2.5
  text "AUSTRALIA" at 75.541,-38.436 h1.52
  text "F" at -118.283,-41.051 h3
  text "F" at 265.714,-41.051 h3
  text "http://www.sil3.com.au" at 75.541,-41.103 h1.52
  text "LAYER" at 243.46,-43.897 h2.01
  text "ASSY. NUMBER:" at 190.501,-44.532 h2.01
  text ".SIL3_LDLREV" at 214.123,-46.056 h3
  text ".DATE_PRINT" at 272.559,-47.215 h1.52 r90
  text "GENERAL TOLERANCE:" at 81.66,-47.831 h1.52
  text "+" at 87.248,-50.498 h1.27
  text "CLASIFFICATION:" at 242.965,-50.883 h2.01
  text "0.2 mm" at 89.788,-51.006 h1.65
  text "SCALE:" at 189.516,-51.033 h2.01
  text "SHEET" at 206.71,-51.033 h2.01
  text "-" at 87.248,-51.641 h1.27
  text "UNLESS OTHERWISE SPECIFIED" at 77.85,-54.054 h1.52
  text "1 OF 1" at 205.36,-54.438 h2.01
  text "NTS" at 190.627,-54.591 h2.01
  text "UNCLASSIFIED" at 244.235,-54.693 h2.03
  text "A3" at 265.559,-59.715 h1.78
  text "1" at -85.289,-60.05 h3
  text "2" at -25.294,-60.05 h3
  text "3" at 39.705,-60.05 h3
  text "4" at 103.713,-60.05 h3
  text "5" at 172.724,-60.05 h3
  text "6" at 233.71,-60.05 h3
  text "PRINT DATE:" at 272.521,-60.66 h1.52 r90

## Text inside footprints (layer, text, board x,y; h text height)
CN10: Top Overlay "J1" at 13.278,87.09 h2; Top Overlay "J2" at 58.978,87.09 h2; Top Overlay "J3" at 15.818,87.09 h2; Top Overlay "J4" at 56.438,87.09 h2
LBL1: Top Overlay "rloop.org" at 70.219,84.701 h1